# EAGLE board 209_ktemp (EAGLE 7.6.0)
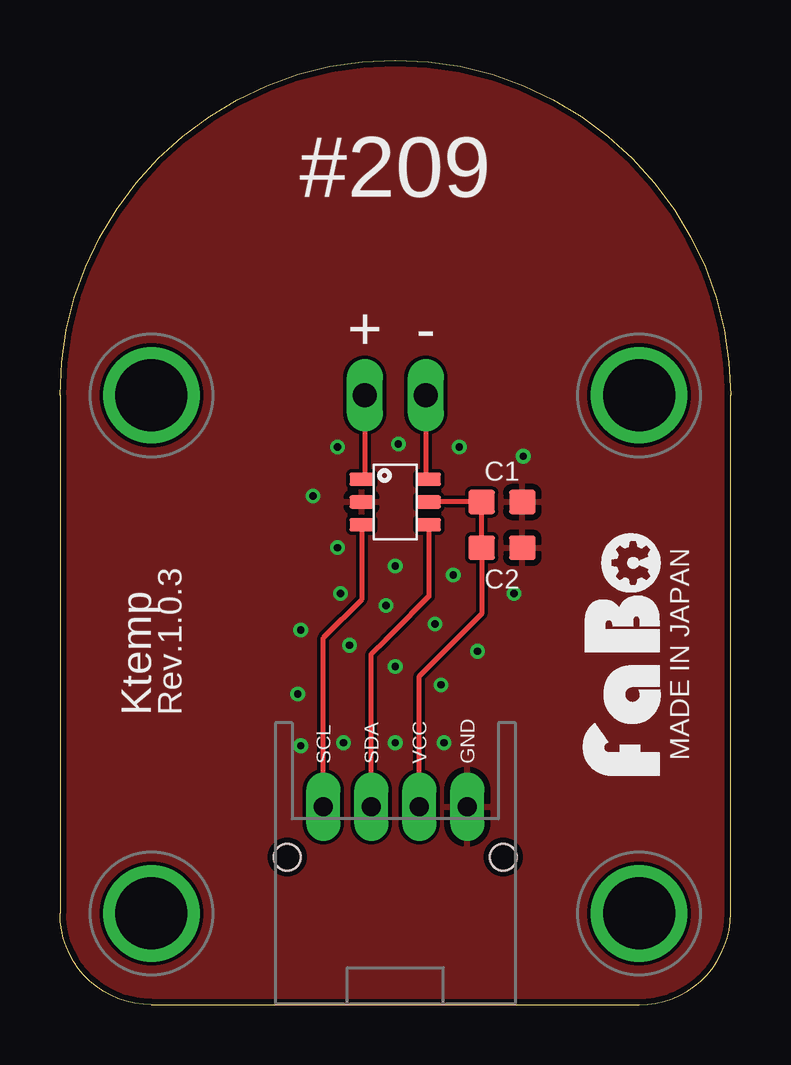
[diagram p0: board, top side]
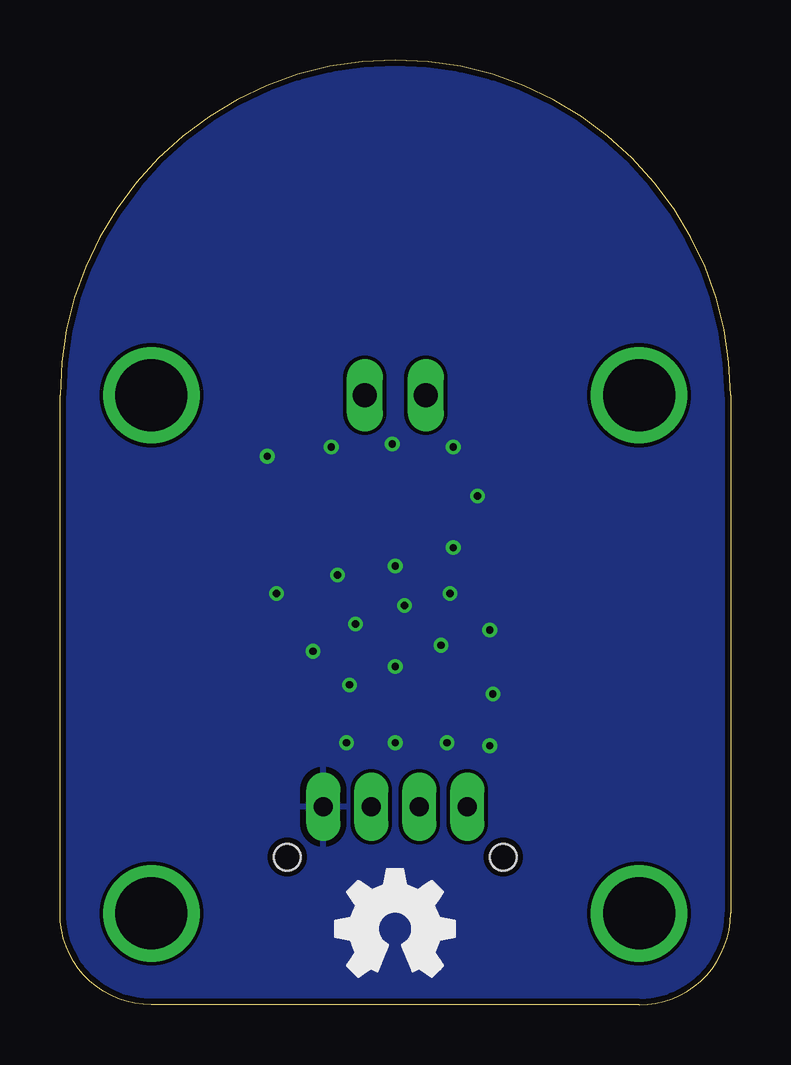
[diagram p1: board, bottom side, seen from below]

Size 27.94 x 39.37 mm. Coordinates in mm from the lower left corner, seen from the top.
Copper layers (1*16): Top 0.035mm / dielectric 1.5mm / Bottom 0.035mm
Design rules "SeeedStudio_2layer_DRU_no_angle_20140221": minimum track width 6mil, minimum drill 12mil, track to track 6mil, track to pad 6mil, pad to pad 6mil, via to via 6mil, smd to smd 0mil, copper to edge 10mil, drill to drill 10mil, minimum pad ring 10mil, minimum via ring 6mil, stop-mask expansion 2mil, vias tented up to drill 100mil, thermal gap 10mil

## Footprints (pad centres in the part's own frame; a part is rotated, then mirrored left to right if it is on the bottom)
0603 = smd 1.1 x 1: 1 -0.85,0; 2 0.85,0
PIN_1X2_LONG = drill 1 long: 1 -1.27,0; 2 1.27,0
SOT-23 = smd 1 x 0.55: 1 -1.4,0.95; 2 -1.4,0; 3 -1.4,-0.95; 4 1.4,-0.95; 5 1.4,0; 6 1.4,0.95
FABO_BRICK_I2C = drill 0.8 pad 1.422 long: GND 3,-10.795; SCL -3,-10.795; SDA -1,-10.795; VCC 1,-10.795 | drill 3 pad 3.81: P$1 -10.16,6.35; P$2 10.16,6.35; P$3 -10.16,-15.24; P$4 10.16,-15.24 | hole 1.1: -4.5,-12.895; 4.5,-12.895

## Placement (x,y rotation side)
C1  0.1uF  [0603]  18.41,20.95 180 top
C2  10uF  [0603]  18.41,19.05 180 top
CN1  [PIN_1X2_LONG]  13.97,25.4 0 top
IC1  [SOT-23]  13.97,20.95 0 top
J1  [FABO_BRICK_I2C]  13.97,19.05 0 top
U$3  [LOGO_OSHW_M_BOTTOM]  13.97,3.17 0 top
U$4  [LOGO_FABO_MS]  25.4,14.61 90 top

## Library data of the parts
C1 C2 = FaBo-Capacitor
CN1 = FaBo-PIN
IC1 = FaBo-Sensor
J1 = FaBo-Template
U$3 U$4 = FaBo-etc

## Nets
5V: C1.2 C2.2 IC1.5 J1.VCC
GND: C1.1 C2.1 IC1.2 J1.GND
SCL: IC1.3 J1.SCL
SDA: IC1.4 J1.SDA
VM: CN1.2 IC1.6
VP: CN1.1 IC1.1

## Tracks (layer width: path | path; a pad name or v marks a point on that pad's centre or on a via)
5V
  Top 0.203: J1.VCC 14.97,13.7 17.57,16.3 C2.2 C1.2 IC1.5
GND  (via drill 0.3)
  other vias: 13.97,18.29 16.38,17.91 13.97,10.92 11.81,10.92 10.03,10.79 16,10.92 15.88,13.34 13.97,14.1 12.06,14.99 10.03,15.62 11.68,17.14 13.59,16.64 11.56,19.05 15.62,15.88 17.4,14.73 18.92,17.14 14.1,23.37 11.56,23.24 16.64,23.24 9.91,12.95 10.54,21.21 19.3,22.86
  pour Bottom: 0,0 27.94,0 27.94,39.37 0,39.37
  pour Top: 0,0 27.94,0 27.94,39.37 0,39.37
SCL
  Top 0.203: IC1.3 12.57,16.89 10.97,15.29 J1.SCL
SDA
  Top 0.203: IC1.4 15.37,17.02 13.84,15.49 13.59,15.24 12.97,14.62 J1.SDA
VM
  Top 0.203: CN1.2 15.24,22.04 IC1.6
VP
  Top 0.203: CN1.1 12.7,22.04 IC1.1

## Text on the board
tPlace: #209 | + | - | MADE IN JAPAN | Ktemp | Rev.1.0.3